# EAGLE board SparkFun_GPS_ZED-F9R_BoB-Panel (EAGLE 9.5.1), part 1 of 2
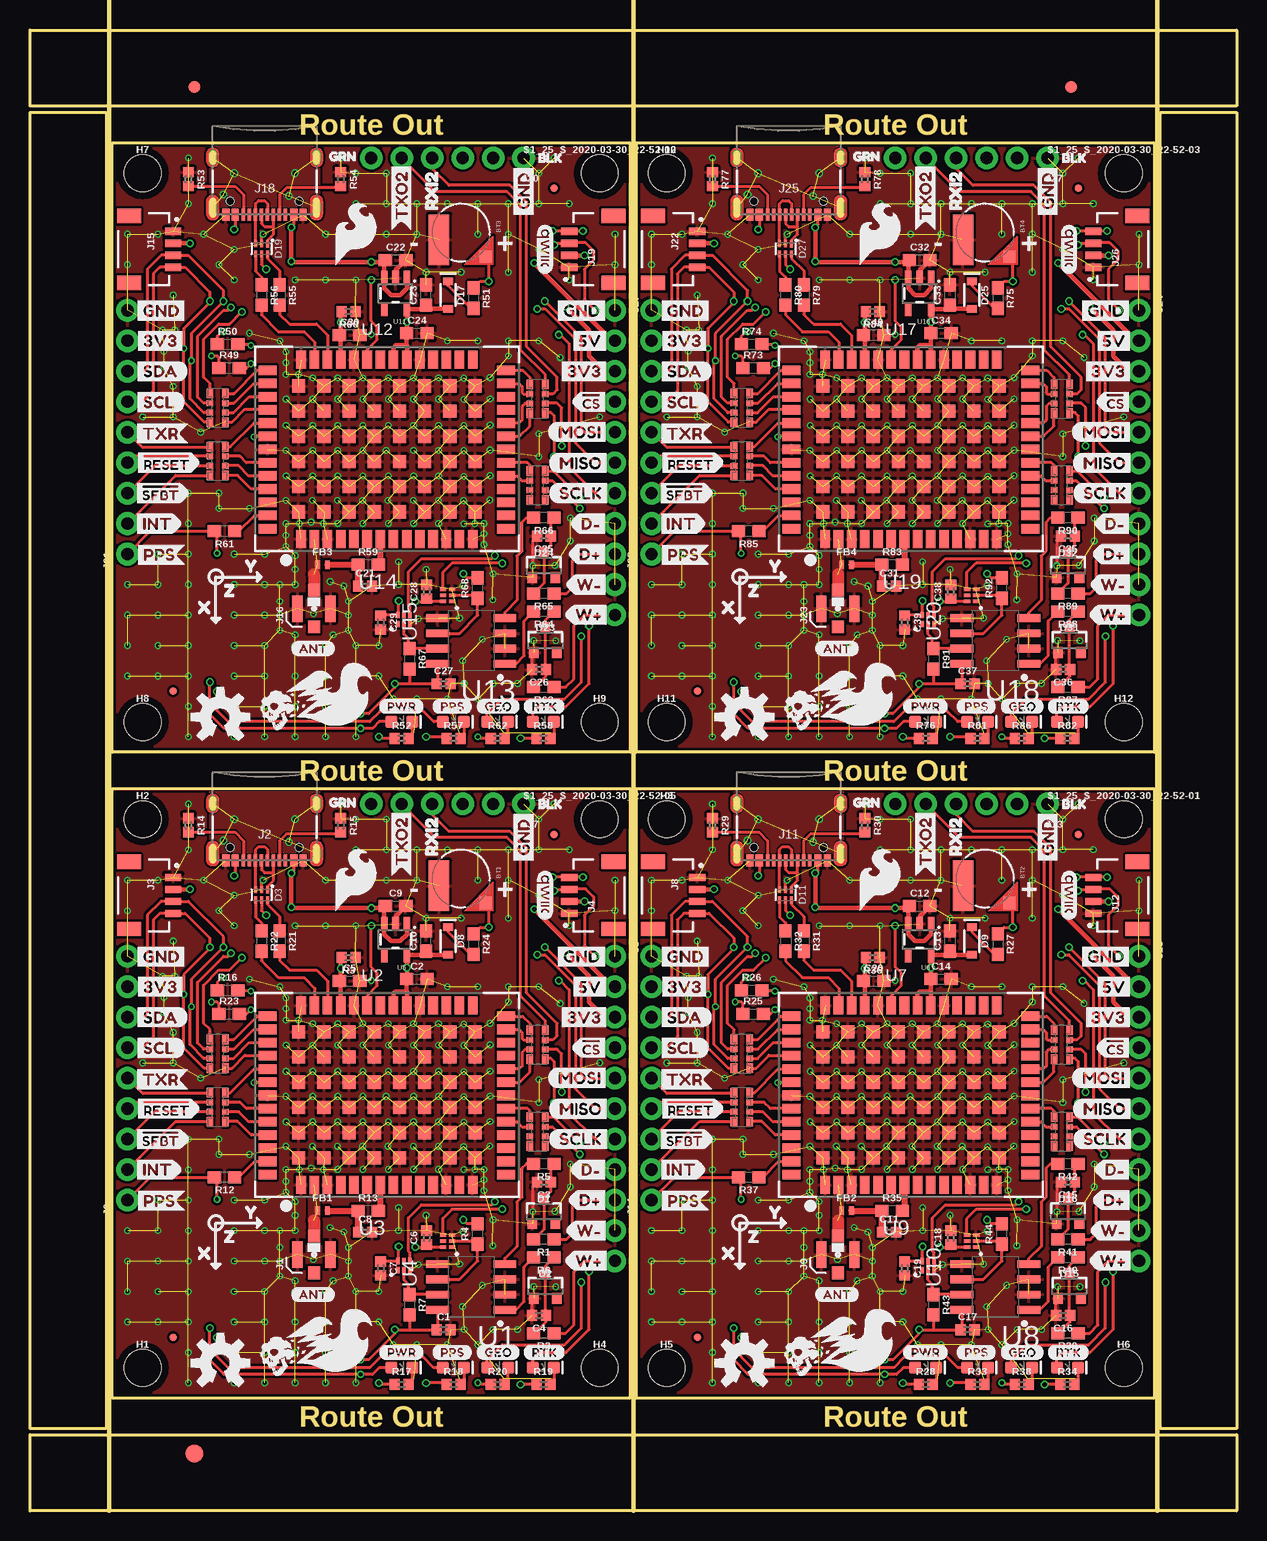
[diagram p0: board, top side]
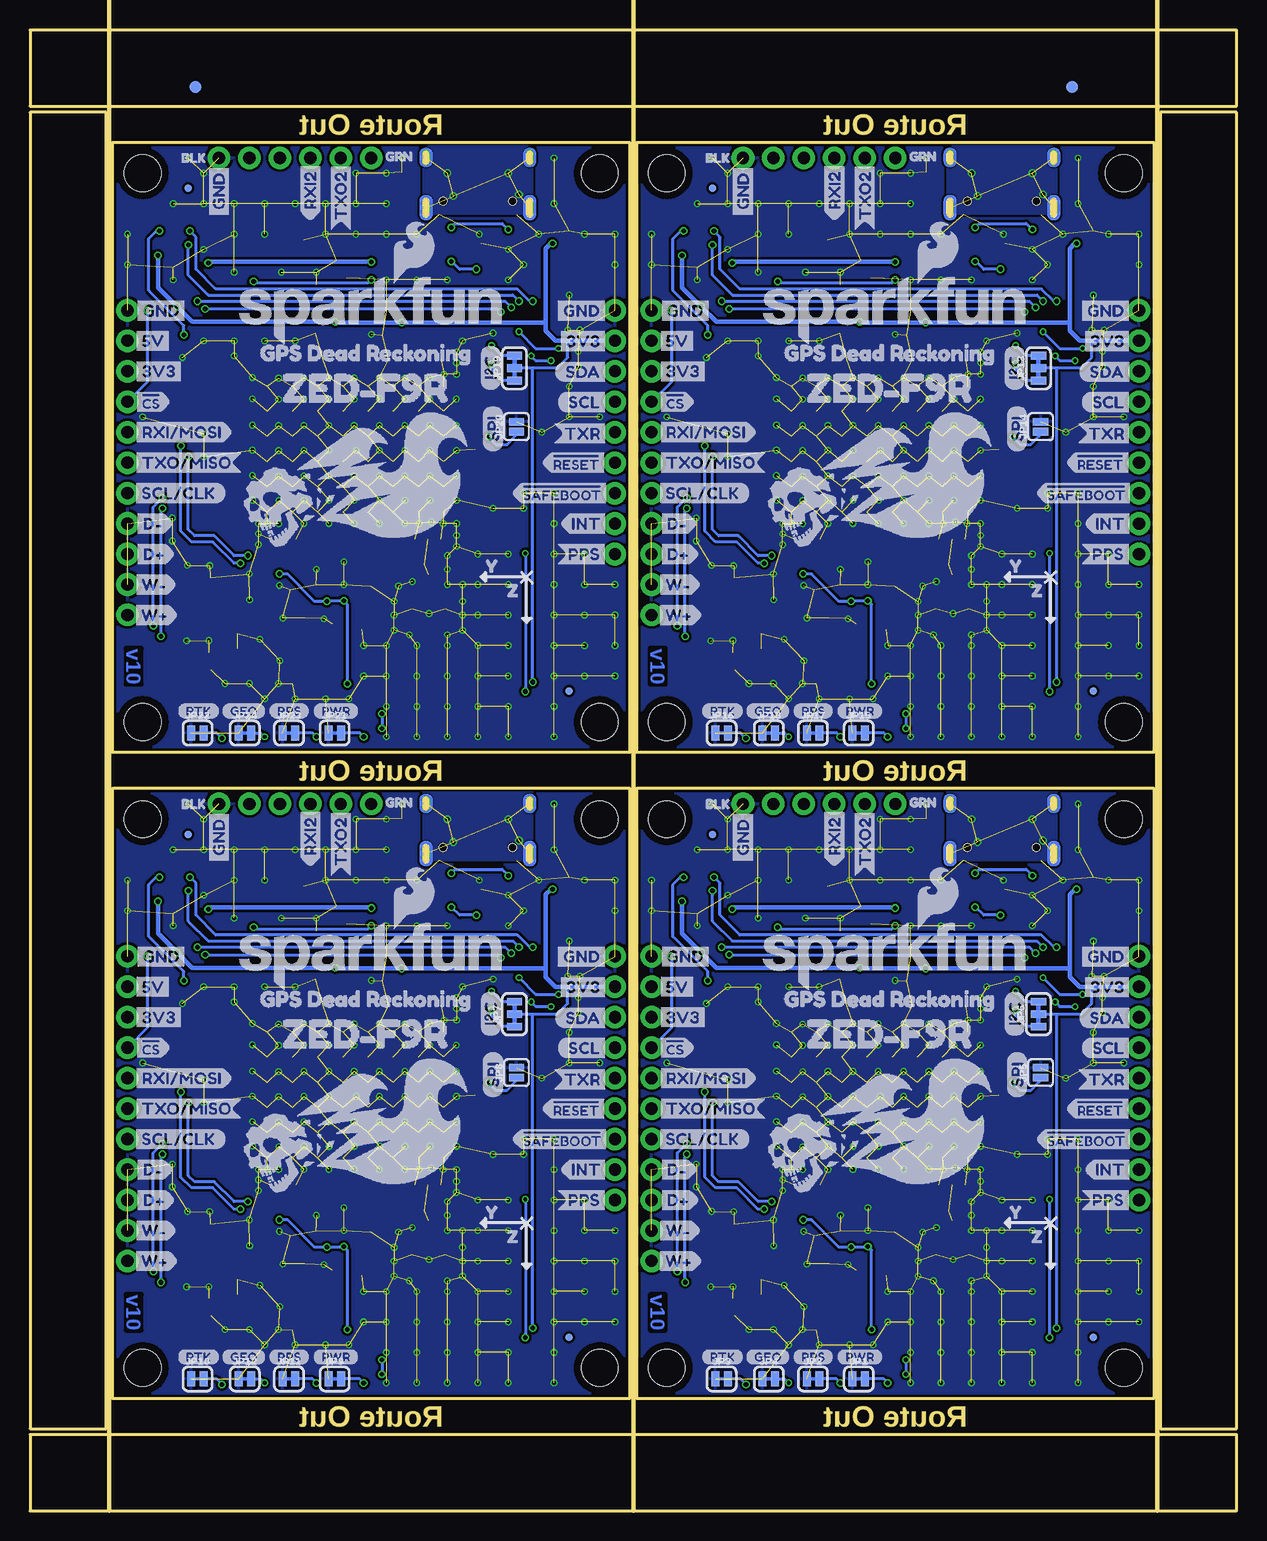
[diagram p1: board, bottom side, seen from below]

Size 100.58 x 123.44 mm. Coordinates in mm from the lower left corner, seen from the top.
Outline: 6.86,9.4 6.86,60.2 50.04,60.2 50.04,9.4 6.86,9.4
Outline: 50.55,9.4 50.55,60.2 93.73,60.2 93.73,9.4 50.55,9.4
Outline: 6.86,63.25 6.86,114.05 50.04,114.05 50.04,63.25 6.86,63.25
Outline: 50.55,63.25 50.55,114.05 93.73,114.05 93.73,63.25 50.55,63.25
Outline: 0,6.35 100.58,6.35 100.58,0 0,0 0,6.35
Outline: 94.23,116.59 100.58,116.59 100.58,6.86 94.23,6.86 94.23,116.59
Outline: 0,123.44 100.58,123.44 100.58,117.09 0,117.09 0,123.44
Outline: 0,116.59 6.35,116.59 6.35,6.86 0,6.86 0,116.59
Copper layers (1*16): Top 0.035mm / dielectric 1.5mm / Bottom 0.035mm
Design rules "Throw": minimum track width 4mil, minimum drill 6mil, track to track 4mil, track to pad 4mil, pad to pad 4mil, via to via 4mil, smd to smd 4mil, copper to edge 4mil, drill to drill 4mil, minimum pad ring 5mil, minimum via ring 5mil, stop-mask expansion 4mil, vias tented up to drill 25mil, thermal gap 10mil
Net classes: 1 Antenna: width 1 mm, clearance 0.3 mm
Milling: 3 lines

## Footprints (pad centres in the part's own frame; a part is rotated, then mirrored left to right if it is on the bottom)
STAND-OFF-TIGHT = hole 3.048: 0,0
ML414H_IV01E = smd 1 x 1: + 2.022,2.032 | smd 4.2 x 1.7: - 0.6,-1.85
0402 = smd 0.85 x 0.9: 1 -0.58,0; 2 0.58,0
0603 = smd 1.1 x 1: 1 -0.85,0; 2 0.85,0
SOT23-3 = smd 0.8 x 0.9: 1 -0.95,-1; 2 0.95,-1; 3 0,1.1
SOT886 = smd 0.61 x 0.25: 1 -0.405,0.5 | smd 0.56 x 0.25: 2 -0.43,0; 3 -0.43,-0.5; 4 0.43,-0.5; 5 0.43,0; 6 0.43,0.5
LED-0603 = smd 1 x 1: A -0.877,0; C 0.877,0
SOD-323 = smd 0.63 x 0.83: A 1.15,0; C -1.15,0
FIDUCIAL-1X2 = smd 1 x 1: 1 0,0
FIDUCIAL-1.5X3 = smd 1.5 x 1.5: 1 0,0
0402_MURATA = smd 0.4 x 0.7: P1 -0.4,0; P2 0.4,0
FIDUCIAL-MICRO = smd 0.635 x 0.635: 1 0,0
U.FL = smd 2.2 x 0.85: 1 0,1.375; 2 0,-1.375 | smd 1.05 x 1: FEED 1.525,0; NC -1.525,0
USB-C-16P-2LAYER-PADS = smd 0.3 x 1: A5 -1.25,-0.34; A6 -0.25,-0.34; A7 0.25,-0.34; A8 1.25,-0.34; B5 1.75,-0.34; B6 0.75,-0.34; B7 -0.75,-0.34; B8 -1.75,-0.34 | smd 0.6 x 1: GND -3.225,-0.34; GND2 3.225,-0.34; VBUS1 -2.45,-0.34; VBUS2 2.45,-0.34 | drill 0.4 pad 0.6 long: SHLD1 -4.318,-0.915; SHLD2 4.318,-0.915; SHLD3 -4.318,-5.095; SHLD4 4.318,-5.095 | hole 0.65: -2.89,-1.445; 2.89,-1.445
JST04_1MM_RA = smd 0.6 x 1.35: 1 -1.5,0; 2 -0.5,0; 3 0.5,0; 4 1.5,0 | smd 1.2 x 2: NC1 2.8,-3.675; NC2 -2.8,-3.675
1X11_NO_SILK = drill 1.016 pad 1.88: 1 0,0; 2 2.54,0; 3 5.08,0; 4 7.62,0; 5 10.16,0; 6 12.7,0; 7 15.24,0; 8 17.78,0; 9 20.32,0; 10 22.86,0; 11 25.4,0
1X09_NO_SILK = drill 1.016 pad 1.88: 1 0,0; 2 2.54,0; 3 5.08,0; 4 7.62,0; 5 10.16,0; 6 12.7,0; 7 15.24,0; 8 17.78,0; 9 20.32,0
1X06_NO_SILK = drill 1.016 pad 1.88: 1 0,0; 2 2.54,0; 3 5.08,0; 4 7.62,0; 5 10.16,0; 6 12.7,0
SMT-JUMPER_2_NC_TRACE_SILK = smd 0.66 x 1.27: 1 -0.521,0; 2 0.521,0
SMT-JUMPER_2_NO_SILK = smd 0.635 x 1.27: 1 -0.406,0; 2 0.406,0
SMT-JUMPER_3_2-NC_TRACE_SILK = smd 0.66 x 1.27: 1 -1.041,0; 2 0,0; 3 1.041,0
1206_RA = smd 0.8 x 0.55: P1 -1.2,-0.62; P4 1.2,-0.62; P5 1.2,0.68; P8 -1.2,0.68 | smd 0.5 x 0.55: P2 -0.4,-0.62; P3 0.4,-0.62; P6 0.4,0.68; P7 -0.4,0.68
SOP_8-PIN = smd 1.9 x 0.64: P1 -2.921,2.032; P2 -2.921,0.762; P3 -2.921,-0.508; P4 -2.921,-1.778; P5 2.679,-1.778; P6 2.679,-0.508; P7 2.679,0.762; P8 2.679,2.032
UBLOX_ZED_F9R = smd 1.1 x 1.1: G1 -7.312,-5.37; G2 -5.212,-5.37; G3 -3.112,-5.37; G4 -1.012,-5.37; G5 1.088,-5.37; G6 3.188,-5.37; G7 5.288,-5.37; G8 7.388,-5.37; G9 7.388,-3.27; G10 5.288,-3.27; G11 3.188,-3.27; G12 1.088,-3.27; G13 -1.012,-3.27; G14 -3.112,-3.27; G15 -5.212,-3.27; G16 -7.312,-3.27; G17 -7.312,-1.17; G18 -5.212,-1.17; G19 -3.112,-1.17; G20 -1.012,-1.17; G21 1.088,-1.17; G22 3.188,-1.17; G23 5.288,-1.17; G24 7.388,-1.17; G25 7.388,0.93; G26 5.288,0.93; G27 3.188,0.93; G28 1.088,0.93; G29 -1.012,0.93; G30 -3.112,0.93; G31 -5.212,0.93; G32 -7.312,0.93; G33 -7.312,3.03; G34 -5.212,3.03; G35 -3.112,3.03; G36 -1.012,3.03; G37 1.088,3.03; G38 3.188,3.03; G39 5.288,3.03; G40 7.388,3.03; G41 7.388,5.13; G42 5.288,5.13; G43 3.188,5.13; G44 1.088,5.13; G45 -1.012,5.13; G46 -3.112,5.13; G47 -5.212,5.13; G48 -7.312,5.13 | smd 0.8 x 1.5: P1 -7.112,-7.62; P2 -6.012,-7.62; P3 -4.912,-7.62; P4 -3.812,-7.62; P5 -2.712,-7.62; P6 -1.612,-7.62; P7 -0.512,-7.62; P8 0.588,-7.62; P9 1.688,-7.62; P10 2.788,-7.62; P11 3.888,-7.62; P12 4.988,-7.62; P13 6.088,-7.62; P14 7.188,-7.62; P28 7.188,7.33; P29 6.088,7.33; P30 4.988,7.33; P31 3.888,7.33; P32 2.788,7.33; P33 1.688,7.33; P34 0.588,7.33; P35 -0.512,7.33; P36 -1.612,7.33; P37 -2.712,7.33; P38 -3.812,7.33; P39 -4.912,7.33; P40 -6.012,7.33; P41 -7.112,7.33 | smd 1.5 x 0.8: P15 9.988,-6.77; P16 9.988,-5.67; P17 9.988,-4.57; P18 9.988,-3.47; P19 9.988,-2.37; P20 9.988,-1.27; P21 9.988,-0.17; P22 9.988,0.93; P23 9.988,2.03; P24 9.988,3.13; P25 9.988,4.23; P26 9.988,5.33; P27 9.988,6.43; P42 -9.912,6.43; P43 -9.912,5.33; P44 -9.912,4.23; P45 -9.912,3.13; P46 -9.912,2.03; P47 -9.912,0.93; P48 -9.912,-0.17; P49 -9.912,-1.27; P50 -9.912,-2.37; P51 -9.912,-3.47; P52 -9.912,-4.57; P53 -9.912,-5.67; P54 -9.912,-6.77
SIP6 = smd 0.3 x 0.52: P1 -0.508,-0.381; P2 -0.008,-0.381; P3 0.492,-0.381; P4 0.492,0.369; P5 -0.008,0.369; P6 -0.508,0.369
SOT23-5 = smd 0.55 x 1.2: 1 -0.95,-1.3; 2 0,-1.3; 3 0.95,-1.3; 4 0.95,1.3; 5 -0.95,1.3

## Placement (x,y rotation side)
$1_25_$_2020-03-30_22-52-01  STAND-OFFTIGHT  [STAND-OFF-TIGHT]  91.19,57.66 0 top
$1_25_$_2020-03-30_22-52-02  STAND-OFFTIGHT  [STAND-OFF-TIGHT]  47.5,111.51 0 top
$1_25_$_2020-03-30_22-52-03  STAND-OFFTIGHT  [STAND-OFF-TIGHT]  91.19,111.51 0 top
$1_25_$_2020-03-30_22-52-05  STAND-OFFTIGHT  [STAND-OFF-TIGHT]  47.5,57.66 0 top
BT1  ML414H_IV01E_BATTERY  [ML414H_IV01E]  35.94,52.7 270 top
BT2  ML414H_IV01E_BATTERY  [ML414H_IV01E]  79.63,52.7 270 top
BT3  ML414H_IV01E_BATTERY  [ML414H_IV01E]  35.94,106.55 270 top
BT4  ML414H_IV01E_BATTERY  [ML414H_IV01E]  79.63,106.55 270 top
C1  0.1uF  [0402]  34.48,15.1 0 top
C2  1.0uF  [0603]  32.26,44.32 0 top
C3  1nF  [0402]  42.84,27.41 180 top
C4  1nF  [0402]  42.43,16.29 180 top
C5  1.0uF  [0603]  26.64,44.17 0 top
C6  0.1uF  [0402]  33.07,22.77 90 top
C7  0.1uF  [0402]  29.24,20.2 270 top
C8  47pF  [0402]  27.94,23.24 0 top
C9  1.0uF  [0603]  30.48,50.42 0 top
C10  1.0uF  [0603]  33.02,47.5 90 top
C11  47pF  [0402]  71.63,23.24 0 top
C12  1.0uF  [0603]  74.17,50.42 0 top
C13  1.0uF  [0603]  76.71,47.5 90 top
C14  1.0uF  [0603]  75.95,44.32 0 top
C15  1nF  [0402]  86.53,27.41 180 top
C16  1nF  [0402]  86.12,16.29 180 top
C17  0.1uF  [0402]  78.17,15.1 0 top
C18  0.1uF  [0402]  76.76,22.77 90 top
C19  0.1uF  [0402]  72.92,20.2 270 top
C20  1.0uF  [0603]  70.33,44.17 0 top
C21  47pF  [0402]  27.94,77.09 0 top
C22  1.0uF  [0603]  30.48,104.27 0 top
C23  1.0uF  [0603]  33.02,101.35 90 top
C24  1.0uF  [0603]  32.26,98.17 0 top
C25  1nF  [0402]  42.84,81.26 180 top
C26  1nF  [0402]  42.43,70.14 180 top
C27  0.1uF  [0402]  34.48,68.95 0 top
C28  0.1uF  [0402]  33.07,76.62 90 top
C29  0.1uF  [0402]  29.24,74.05 270 top
C30  1.0uF  [0603]  26.64,98.02 0 top
C31  47pF  [0402]  71.63,77.09 0 top
C32  1.0uF  [0603]  74.17,104.27 0 top
C33  1.0uF  [0603]  76.71,101.35 90 top
C34  1.0uF  [0603]  75.95,98.17 0 top
C35  1nF  [0402]  86.53,81.26 180 top
C36  1nF  [0402]  86.12,70.14 180 top
C37  0.1uF  [0402]  78.17,68.95 0 top
C38  0.1uF  [0402]  76.76,76.62 90 top
C39  0.1uF  [0402]  72.92,74.05 270 top
C40  1.0uF  [0603]  70.33,98.02 0 top
D1  15V  [SOT23-3]  42.84,24.94 0 top
D2  15V  [SOT23-3]  42.97,18.71 0 top
D3  PRTR5V0U2F  [SOT886]  19.3,51.36 270 top
D4  RED  [LED-0603]  30.99,11.94 0 top
D5  BLUE  [LED-0603]  35.31,11.94 0 top
D6  BLUE  [LED-0603]  42.8,11.94 0 top
D7  BLUE  [LED-0603]  38.99,11.94 0 top
D8  0.5A/40V/420mV  [SOD-323]  34.85,47.5 270 top
D9  0.5A/40V/420mV  [SOD-323]  78.54,47.5 270 top
D10  RED  [LED-0603]  74.68,11.94 0 top
D11  PRTR5V0U2F  [SOT886]  62.99,51.36 270 top
D12  BLUE  [LED-0603]  78.99,11.94 0 top
D13  BLUE  [LED-0603]  86.49,11.94 0 top
D14  BLUE  [LED-0603]  82.68,11.94 0 top
D15  15V  [SOT23-3]  86.65,18.71 0 top
D16  15V  [SOT23-3]  86.53,24.94 0 top
D17  0.5A/40V/420mV  [SOD-323]  34.85,101.35 270 top
D18  RED  [LED-0603]  30.99,65.79 0 top
D19  PRTR5V0U2F  [SOT886]  19.3,105.21 270 top
D20  BLUE  [LED-0603]  35.31,65.79 0 top
D21  BLUE  [LED-0603]  42.8,65.79 0 top
D22  BLUE  [LED-0603]  38.99,65.79 0 top
D23  15V  [SOT23-3]  42.97,72.56 0 top
D24  15V  [SOT23-3]  42.84,78.79 0 top
D25  0.5A/40V/420mV  [SOD-323]  78.54,101.35 270 top
D26  RED  [LED-0603]  74.68,65.79 0 top
D27  PRTR5V0U2F  [SOT886]  62.99,105.21 270 top
D28  BLUE  [LED-0603]  78.99,65.79 0 top
D29  BLUE  [LED-0603]  86.49,65.79 0 top
D30  BLUE  [LED-0603]  82.68,65.79 0 top
D31  15V  [SOT23-3]  86.65,72.56 0 top
D32  15V  [SOT23-3]  86.53,78.79 0 top
E$1  [FIDUCIAL-1X2]  13.72,118.68 0 top
E$2  [FIDUCIAL-1X2]  13.72,118.68 0 bottom
E$3  [FIDUCIAL-1X2]  86.8,118.68 0 top
E$4  [FIDUCIAL-1X2]  86.8,118.68 0 bottom
E$5  [FIDUCIAL-1.5X3]  13.72,4.76 0 top
FB1  120NH  [0402_MURATA]  24.38,25.02 0 top
FB2  120NH  [0402_MURATA]  68.07,25.02 0 top
FB3  120NH  [0402_MURATA]  24.38,78.87 0 top
FB4  120NH  [0402_MURATA]  68.07,78.87 0 top
FD1  FIDUCIALUFIDUCIAL  [FIDUCIAL-MICRO]  11.94,14.48 0 top
FD2  FIDUCIALUFIDUCIAL  [FIDUCIAL-MICRO]  11.94,14.48 0 bottom
FD3  FIDUCIALUFIDUCIAL  [FIDUCIAL-MICRO]  43.69,56.39 0 top
FD4  FIDUCIALUFIDUCIAL  [FIDUCIAL-MICRO]  43.69,56.39 0 bottom
FD5  FIDUCIALUFIDUCIAL  [FIDUCIAL-MICRO]  87.38,56.39 0 top
FD6  FIDUCIALUFIDUCIAL  [FIDUCIAL-MICRO]  55.63,14.48 0 bottom
FD7  FIDUCIALUFIDUCIAL  [FIDUCIAL-MICRO]  87.38,56.39 0 bottom
FD8  FIDUCIALUFIDUCIAL  [FIDUCIAL-MICRO]  55.63,14.48 0 top
FD9  FIDUCIALUFIDUCIAL  [FIDUCIAL-MICRO]  43.69,110.24 0 top
FD10  FIDUCIALUFIDUCIAL  [FIDUCIAL-MICRO]  11.94,68.33 0 bottom
FD11  FIDUCIALUFIDUCIAL  [FIDUCIAL-MICRO]  43.69,110.24 0 bottom
FD12  FIDUCIALUFIDUCIAL  [FIDUCIAL-MICRO]  11.94,68.33 0 top
FD13  FIDUCIALUFIDUCIAL  [FIDUCIAL-MICRO]  87.38,110.24 0 top
FD14  FIDUCIALUFIDUCIAL  [FIDUCIAL-MICRO]  55.63,68.33 0 bottom
FD15  FIDUCIALUFIDUCIAL  [FIDUCIAL-MICRO]  87.38,110.24 0 bottom
FD16  FIDUCIALUFIDUCIAL  [FIDUCIAL-MICRO]  55.63,68.33 0 top
H1  STAND-OFFTIGHT  [STAND-OFF-TIGHT]  9.4,11.91 0 top
H2  STAND-OFFTIGHT  [STAND-OFF-TIGHT]  9.4,57.66 0 top
H3  STAND-OFFTIGHT  [STAND-OFF-TIGHT]  53.09,57.66 0 top
H4  STAND-OFFTIGHT  [STAND-OFF-TIGHT]  47.5,11.91 0 top
H5  STAND-OFFTIGHT  [STAND-OFF-TIGHT]  53.09,11.91 0 top
H6  STAND-OFFTIGHT  [STAND-OFF-TIGHT]  91.19,11.91 0 top
H7  STAND-OFFTIGHT  [STAND-OFF-TIGHT]  9.4,111.51 0 top
H8  STAND-OFFTIGHT  [STAND-OFF-TIGHT]  9.4,65.76 0 top
H9  STAND-OFFTIGHT  [STAND-OFF-TIGHT]  47.5,65.76 0 top
H10  STAND-OFFTIGHT  [STAND-OFF-TIGHT]  53.09,111.51 0 top
H11  STAND-OFFTIGHT  [STAND-OFF-TIGHT]  53.09,65.76 0 top
H12  STAND-OFFTIGHT  [STAND-OFF-TIGHT]  91.19,65.76 0 top
J1  U.FL  [U.FL]  23.67,21.36 90 top
J2  [USB-C-16P-2LAYER-PADS]  19.56,53.87 180 top
J3  QWIIC_RIGHT_ANGLE  [JST04_1MM_RA]  11.94,51.31 270 top
J4  QWIIC_RIGHT_ANGLE  [JST04_1MM_RA]  44.96,51.31 90 top
J5  [1X11_NO_SILK]  48.77,46.23 270 top
J6  [1X09_NO_SILK]  8.13,25.91 90 top
J7  [1X06_NO_SILK]  41.15,58.93 180 top
J8  QWIIC_RIGHT_ANGLE  [JST04_1MM_RA]  55.63,51.31 270 top
J9  U.FL  [U.FL]  67.36,21.36 90 top
J10  [1X11_NO_SILK]  92.46,46.23 270 top
J11  [USB-C-16P-2LAYER-PADS]  63.25,53.87 180 top
J12  QWIIC_RIGHT_ANGLE  [JST04_1MM_RA]  88.65,51.31 90 top
J13  [1X06_NO_SILK]  84.84,58.93 180 top
J14  [1X09_NO_SILK]  51.82,25.91 90 top
J15  QWIIC_RIGHT_ANGLE  [JST04_1MM_RA]  11.94,105.16 270 top
J16  U.FL  [U.FL]  23.67,75.21 90 top
J17  [1X11_NO_SILK]  48.77,100.08 270 top
J18  [USB-C-16P-2LAYER-PADS]  19.56,107.72 180 top
J19  QWIIC_RIGHT_ANGLE  [JST04_1MM_RA]  44.96,105.16 90 top
J20  [1X06_NO_SILK]  41.15,112.78 180 top
J21  [1X09_NO_SILK]  8.13,79.76 90 top
J22  QWIIC_RIGHT_ANGLE  [JST04_1MM_RA]  55.63,105.16 270 top
J23  U.FL  [U.FL]  67.36,75.21 90 top
J24  [1X11_NO_SILK]  92.46,100.08 270 top
J25  [USB-C-16P-2LAYER-PADS]  63.25,107.72 180 top
J26  QWIIC_RIGHT_ANGLE  [JST04_1MM_RA]  88.65,105.16 90 top
J27  [1X06_NO_SILK]  84.84,112.78 180 top
J28  [1X09_NO_SILK]  51.82,79.76 90 top
JP1  JUMPER-SMT_2_NC_TRACE_SILK  [SMT-JUMPER_2_NC_TRACE_SILK]  31.5,11 0 bottom
JP2  JUMPER-SMT_2_NC_TRACE_SILK  [SMT-JUMPER_2_NC_TRACE_SILK]  35.31,11 0 bottom
JP3  JUMPER-SMT_2_NC_TRACE_SILK  [SMT-JUMPER_2_NC_TRACE_SILK]  42.93,11 0 bottom
JP4  JUMPER-SMT_2_NC_TRACE_SILK  [SMT-JUMPER_2_NC_TRACE_SILK]  38.99,11 0 bottom
JP5  JUMPER-SMT_2_NO_SILK  [SMT-JUMPER_2_NO_SILK]  16.33,36.53 90 bottom
JP6  JUMPER-SMT_3_2-NC_TRACE_SILK  [SMT-JUMPER_3_2-NC_TRACE_SILK]  16.51,41.4 90 bottom
JP7  JUMPER-SMT_3_2-NC_TRACE_SILK  [SMT-JUMPER_3_2-NC_TRACE_SILK]  60.2,41.4 90 bottom
JP8  JUMPER-SMT_2_NO_SILK  [SMT-JUMPER_2_NO_SILK]  60.02,36.53 90 bottom
JP9  JUMPER-SMT_2_NC_TRACE_SILK  [SMT-JUMPER_2_NC_TRACE_SILK]  75.18,11 0 bottom
JP10  JUMPER-SMT_2_NC_TRACE_SILK  [SMT-JUMPER_2_NC_TRACE_SILK]  86.61,11 0 bottom
JP11  JUMPER-SMT_2_NC_TRACE_SILK  [SMT-JUMPER_2_NC_TRACE_SILK]  78.99,11 0 bottom
JP12  JUMPER-SMT_2_NC_TRACE_SILK  [SMT-JUMPER_2_NC_TRACE_SILK]  82.68,11 0 bottom
JP13  JUMPER-SMT_3_2-NC_TRACE_SILK  [SMT-JUMPER_3_2-NC_TRACE_SILK]  16.51,95.25 90 bottom
JP14  JUMPER-SMT_2_NO_SILK  [SMT-JUMPER_2_NO_SILK]  16.33,90.37 90 bottom
JP15  JUMPER-SMT_2_NC_TRACE_SILK  [SMT-JUMPER_2_NC_TRACE_SILK]  31.5,64.85 0 bottom
JP16  JUMPER-SMT_2_NC_TRACE_SILK  [SMT-JUMPER_2_NC_TRACE_SILK]  42.93,64.85 0 bottom
JP17  JUMPER-SMT_2_NC_TRACE_SILK  [SMT-JUMPER_2_NC_TRACE_SILK]  35.31,64.85 0 bottom
JP18  JUMPER-SMT_2_NC_TRACE_SILK  [SMT-JUMPER_2_NC_TRACE_SILK]  38.99,64.85 0 bottom
JP19  JUMPER-SMT_3_2-NC_TRACE_SILK  [SMT-JUMPER_3_2-NC_TRACE_SILK]  60.2,95.25 90 bottom
JP20  JUMPER-SMT_2_NO_SILK  [SMT-JUMPER_2_NO_SILK]  60.02,90.37 90 bottom
JP21  JUMPER-SMT_2_NC_TRACE_SILK  [SMT-JUMPER_2_NC_TRACE_SILK]  75.18,64.85 0 bottom
JP22  JUMPER-SMT_2_NC_TRACE_SILK  [SMT-JUMPER_2_NC_TRACE_SILK]  86.61,64.85 0 bottom
JP23  JUMPER-SMT_2_NC_TRACE_SILK  [SMT-JUMPER_2_NC_TRACE_SILK]  78.99,64.85 0 bottom
JP24  JUMPER-SMT_2_NC_TRACE_SILK  [SMT-JUMPER_2_NC_TRACE_SILK]  82.68,64.85 0 bottom
LOGO1  OSHW-LOGOM  [OSHW-LOGO-M]  15.88,12.32 0 top
LOGO2  QWIIC_LOGO_4MM  [QWIIC_4MM]  42.93,51.31 270 top
LOGO3  SFE_LOGO_NAME_FLAME.2_INCH  [SFE_LOGO_NAME_FLAME_.2]  28.45,46.23 0 bottom
LOGO4  SFE_LOGO_NAME_FLAME.2_INCH  [SFE_LOGO_NAME_FLAME_.2]  72.14,46.23 0 bottom
LOGO5  QWIIC_LOGO_4MM  [QWIIC_4MM]  86.61,51.31 270 top
LOGO6  OSHW-LOGOM  [OSHW-LOGO-M]  59.56,12.32 0 top
LOGO7  SFE_LOGO_NAME_FLAME.2_INCH  [SFE_LOGO_NAME_FLAME_.2]  28.45,100.08 0 bottom
LOGO8  QWIIC_LOGO_4MM  [QWIIC_4MM]  42.93,105.16 270 top
LOGO9  OSHW-LOGOM  [OSHW-LOGO-M]  15.88,66.17 0 top
LOGO10  SFE_LOGO_NAME_FLAME.2_INCH  [SFE_LOGO_NAME_FLAME_.2]  72.14,100.08 0 bottom
LOGO11  QWIIC_LOGO_4MM  [QWIIC_4MM]  86.61,105.16 270 top
LOGO12  OSHW-LOGOM  [OSHW-LOGO-M]  59.56,66.17 0 top
R1  3.3k  [0603]  42.84,22.63 180 top
R2  3.3k  [0603]  42.84,14.82 180 top
R3  100K  [0402]  26.57,46.13 180 top
R4  910  [0603]  37.33,23.08 90 top
R5  470  [0603]  42.84,28.93 180 top
R6  470  [0603]  42.84,21.13 180 top
R7  910  [0603]  31.64,17.18 270 top
R8  33  [1206_RA]  15.62,33.66 270 top
R9  33  [1206_RA]  15.62,38.1 270 top
R10  33  [1206_RA]  42.29,38.86 270 top
R11  33  [1206_RA]  42.29,31.62 270 top
R12  33  [0603]  16.22,27.81 180 top
R13  33  [0603]  28.19,25.02 0 top
R14  5.1k  [0402]  13.21,57.15 270 top
R15  5.1k  [0402]  25.91,57.15 270 top
R16  2.2k  [0603]  16.48,43.4 0 top
R17  1KOHM-0402-1/16W-1%  [0402]  30.99,10.54 0 top
R18  1KOHM-0402-1/16W-1%  [0402]  35.31,10.54 0 top
R19  1KOHM-0402-1/16W-1%  [0402]  42.8,10.54 0 top
R20  1KOHM-0402-1/16W-1%  [0402]  38.99,10.54 0 top
R21  27  [0603]  20.83,47.5 270 top
R22  27  [0603]  19.3,47.5 270 top
R23  2.2k  [0603]  16.61,41.43 0 top
R24  3.3k  [0603]  36.98,47.24 270 top
R25  2.2k  [0603]  60.29,41.43 0 top
R26  2.2k  [0603]  60.17,43.4 0 top
R27  3.3k  [0603]  80.67,47.24 270 top
R28  1KOHM-0402-1/16W-1%  [0402]  74.68,10.54 0 top
R29  5.1k  [0402]  56.9,57.15 270 top
R30  5.1k  [0402]  69.6,57.15 270 top
R31  27  [0603]  64.52,47.5 270 top
R32  27  [0603]  62.99,47.5 270 top
R33  1KOHM-0402-1/16W-1%  [0402]  78.99,10.54 0 top
R34  1KOHM-0402-1/16W-1%  [0402]  86.49,10.54 0 top
R35  33  [0603]  71.88,25.02 0 top
R36  100K  [0402]  70.26,46.13 180 top
R37  33  [0603]  59.91,27.81 180 top
R38  1KOHM-0402-1/16W-1%  [0402]  82.68,10.54 0 top
R39  3.3k  [0603]  86.53,14.82 180 top
R40  470  [0603]  86.53,21.13 180 top
R41  3.3k  [0603]  86.53,22.63 180 top
R42  470  [0603]  86.53,28.93 180 top
R43  910  [0603]  75.33,17.18 270 top
R44  910  [0603]  81.02,23.08 90 top
R45  33  [1206_RA]  59.31,38.1 270 top
R46  33  [1206_RA]  59.31,33.66 270 top
R47  33  [1206_RA]  85.98,38.86 270 top
R48  33  [1206_RA]  85.98,31.62 270 top
R49  2.2k  [0603]  16.61,95.28 0 top
R50  2.2k  [0603]  16.48,97.25 0 top
R51  3.3k  [0603]  36.98,101.09 270 top
R52  1KOHM-0402-1/16W-1%  [0402]  30.99,64.39 0 top
R53  5.1k  [0402]  13.21,111 270 top
R54  5.1k  [0402]  25.91,111 270 top
R55  27  [0603]  20.83,101.35 270 top
R56  27  [0603]  19.3,101.35 270 top
R57  1KOHM-0402-1/16W-1%  [0402]  35.31,64.39 0 top
R58  1KOHM-0402-1/16W-1%  [0402]  42.8,64.39 0 top
R59  33  [0603]  28.19,78.87 0 top
R60  100K  [0402]  26.57,99.97 180 top
R61  33  [0603]  16.22,81.66 180 top
R62  1KOHM-0402-1/16W-1%  [0402]  38.99,64.39 0 top
R63  3.3k  [0603]  42.84,68.67 180 top
R64  470  [0603]  42.84,74.97 180 top
R65  3.3k  [0603]  42.84,76.48 180 top
R66  470  [0603]  42.84,82.78 180 top
R67  910  [0603]  31.64,71.03 270 top
R68  910  [0603]  37.33,76.93 90 top
R69  33  [1206_RA]  15.62,91.95 270 top
R70  33  [1206_RA]  15.62,87.5 270 top
R71  33  [1206_RA]  42.29,92.71 270 top
R72  33  [1206_RA]  42.29,85.47 270 top
R73  2.2k  [0603]  60.29,95.28 0 top
R74  2.2k  [0603]  60.17,97.25 0 top
R75  3.3k  [0603]  80.67,101.09 270 top
R76  1KOHM-0402-1/16W-1%  [0402]  74.68,64.39 0 top
R77  5.1k  [0402]  56.9,111 270 top
R78  5.1k  [0402]  69.6,111 270 top
R79  27  [0603]  64.52,101.35 270 top
R80  27  [0603]  62.99,101.35 270 top
R81  1KOHM-0402-1/16W-1%  [0402]  78.99,64.39 0 top
R82  1KOHM-0402-1/16W-1%  [0402]  86.49,64.39 0 top
R83  33  [0603]  71.88,78.87 0 top
R84  100K  [0402]  70.26,99.97 180 top
R85  33  [0603]  59.91,81.66 180 top
R86  1KOHM-0402-1/16W-1%  [0402]  82.68,64.39 0 top
R87  3.3k  [0603]  86.53,68.67 180 top
R88  470  [0603]  86.53,74.97 180 top
R89  3.3k  [0603]  86.53,76.48 180 top
R90  470  [0603]  86.53,82.78 180 top
R91  910  [0603]  75.33,71.03 270 top
R92  910  [0603]  81.02,76.93 90 top
R93  33  [1206_RA]  59.31,91.95 270 top
R94  33  [1206_RA]  59.31,87.5 270 top
R95  33  [1206_RA]  85.98,92.71 270 top
R96  33  [1206_RA]  85.98,85.47 270 top
U1  DUAL-OPTO_HCPL-073L  [SOP_8-PIN]  36.67,18.79 180 top
U2  U-BLOX_ZED_F9R  [UBLOX_ZED_F9R]  29.72,34.8 0 top
U3  UHS_INVERTER_SCHMITT_TRIGGERSIP6  [SIP6]  31.19,20.45 0 top
U4  UHS_INVERTER_SCHMITT_TRIGGERSIP6  [SIP6]  34.8,22.48 90 top
U5  3.3V  [SOT23-5]  30.48,47.62 180 top
U6  3.3V  [SOT23-5]  74.17,47.62 180 top
U7  U-BLOX_ZED_F9R  [UBLOX_ZED_F9R]  73.41,34.8 0 top
U8  DUAL-OPTO_HCPL-073L  [SOP_8-PIN]  80.36,18.79 180 top
U9  UHS_INVERTER_SCHMITT_TRIGGERSIP6  [SIP6]  74.88,20.45 0 top
U10  UHS_INVERTER_SCHMITT_TRIGGERSIP6  [SIP6]  78.49,22.48 90 top
U11  3.3V  [SOT23-5]  30.48,101.47 180 top
U12  U-BLOX_ZED_F9R  [UBLOX_ZED_F9R]  29.72,88.65 0 top
U13  DUAL-OPTO_HCPL-073L  [SOP_8-PIN]  36.67,72.64 180 top
U14  UHS_INVERTER_SCHMITT_TRIGGERSIP6  [SIP6]  31.19,74.3 0 top
U15  UHS_INVERTER_SCHMITT_TRIGGERSIP6  [SIP6]  34.8,76.33 90 top
U16  3.3V  [SOT23-5]  74.17,101.47 180 top
U17  U-BLOX_ZED_F9R  [UBLOX_ZED_F9R]  73.41,88.65 0 top
U18  DUAL-OPTO_HCPL-073L  [SOP_8-PIN]  80.36,72.64 180 top
U19  UHS_INVERTER_SCHMITT_TRIGGERSIP6  [SIP6]  74.88,74.3 0 top
U20  UHS_INVERTER_SCHMITT_TRIGGERSIP6  [SIP6]  78.49,76.33 90 top
U$1  [3V3-04]  43.84,41.15 0 top
U$2  [GND-04]  43.56,46.2 0 top
U$3  [D#0]  44.86,25.91 0 top
U$4  [PPS8]  33.53,13.21 0 top
U$5  [PWR10]  29.08,13.21 0 top
U$6  [D#1]  45.01,28.45 0 top
U$7  [#RESET2]  14.35,33.53 0 bottom
U$8  [RTK9]  41.15,13.21 0 top
U$9  [W#2]  44.58,20.85 0 top
U$10  [W#3]  44.63,23.37 0 top
U$11  [5V]  44.81,43.69 0 top
U$12  [INT1]  8.43,28.45 0 top
U$13  [PPS4]  8.53,25.86 0 top
U$14  [RXI22]  33.48,53.67 90 top
U$15  [GND-04]  41.15,53.72 90 top
U$16  [TXO21]  30.96,52.83 90 top
U$17  [SCLK1]  43.21,30.99 0 top
U$18  [TXR0]  8.43,35.97 0 top
U$19  [DEAD#RECKONING#GPS#BOARD#SILK#FINAL#JPG]  29.72,32.26 0 bottom
U$20  [DEAD#RECKONING#GPS#BOARD#SILK#FINAL#JPG]  23.88,14.1 0 top
U$21  [BLK2]  41.66,58.93 0 top
U$22  [RTK9]  44.58,12.83 0 bottom
U$23  [GRN1]  24.26,59.05 0 top
U$24  [INT2]  12.7,28.45 0 bottom
U$25  [GPS_DEAD_RECKONING0]  38.86,42.67 0 bottom
U$26  [CS#-<]-04]  44.96,38.61 0 top
U$27  [PPS1]  12.95,25.91 0 bottom
U$28  [#SAFEBOOT3]  16.89,30.99 0 bottom
U$29  [3V3-04]  48.51,41.15 0 bottom
U$30  [RXI#MOSI0]  48.51,36.07 0 bottom
U$31  [GND-04]  48.39,46.2 0 bottom
U$32  [X1]  13.08,21.46 0 top
U$33  [5V]  48.51,43.69 0 bottom
U$34  [GND-04]  41.15,53.72 90 bottom
U$35  [RXI28]  33.53,53.72 90 bottom
U$36  [TXO21]  30.99,52.83 90 bottom
U$37  [TXO#MISO1]  48.51,33.53 0 bottom
U$38  [SCL#CLK2]  48.51,30.99 0 bottom
U$39  [SCL5]  12.93,38.58 0 bottom
U$40  [3V3-04]  13.13,43.66 0 bottom
U$41  [GND-04]  13.34,46.2 0 bottom
U$42  [SDA4]  13.16,41.1 0 bottom
U$43  [TXR3]  13.28,35.97 0 bottom
U$44  [#RESET1]  8.38,33.53 0 top
U$45  [SPI4]  18.29,34.42 90 bottom
U$46  [I_SUPER2_C-()-04]  18.49,39.53 90 bottom
U$47  [PPS8]  36.96,12.83 0 bottom
U$48  [PWR10]  33.27,12.83 0 bottom
U$49  [ANT0]  21.72,18.03 0 top
U$50  [Y2]  17.02,24.89 0 top
U$51  [ZED#F9R0]  37.85,39.75 0 bottom
U$52  [Y2]  19.81,24.89 0 bottom
U$53  [GRN1]  27.94,59.05 0 bottom
U$54  [BLK2]  44.96,58.93 0 bottom
U$55  [#SFBT0]  8.25,30.99 0 top
U$56  [GEO1]  37.21,13.21 0 top
U$57  [Z0]  18.03,22.86 0 bottom
U$58  [GEO1]  40.89,12.83 0 bottom
U$59  [CS#-[>-04]  48.64,38.61 0 bottom
U$60  [D#0]  48.39,25.91 0 bottom
U$61  [W#2]  48.54,20.83 0 bottom
U$62  [SFE_LOGO_FLAME_.2]  27.18,52.58 0 top
U$63  [Z0]  15.24,22.86 0 top
U$64  [D#1]  48.39,28.45 0 bottom
U$65  [W#3]  48.54,23.37 0 bottom
U$66  [MISO-(]-04]  43.18,33.5 0 top
U$67  [SCL-[)]  8.51,38.58 0 top
U$68  [SDA-[)]  8.51,41.15 0 top
U$69  [MOSI-(]-04]  43.1,36.09 0 top
U$70  [3V3-04]  8.51,43.69 0 top
U$71  [GND-04]  8.51,46.2 0 top
U$72  [CS#-<]-04]  88.65,38.61 0 top
U$73  [PPS8]  77.22,13.21 0 top
U$74  [PWR10]  72.77,13.21 0 top
U$75  [RTK9]  84.84,13.21 0 top
U$76  [BLK2]  85.34,58.93 0 top
U$77  [GRN1]  67.95,59.05 0 top
U$78  [3V3-04]  56.82,43.66 0 bottom
U$79  [GND-04]  57.02,46.2 0 bottom
U$80  [3V3-04]  92.2,41.15 0 bottom
U$81  [GND-04]  92.08,46.2 0 bottom
U$82  [5V]  92.2,43.69 0 bottom
U$83  [GND-04]  84.84,53.72 90 bottom
U$84  [RXI28]  77.22,53.72 90 bottom
U$85  [TXO21]  74.68,52.83 90 bottom
U$86  [SPI4]  61.98,34.42 90 bottom
U$87  [I_SUPER2_C-()-04]  62.18,39.53 90 bottom
U$88  [RTK9]  88.27,12.83 0 bottom
U$89  [PPS8]  80.65,12.83 0 bottom
U$90  [PWR10]  76.96,12.83 0 bottom
U$91  [ANT0]  65.41,18.03 0 top
U$92  [ZED#F9R0]  81.53,39.75 0 bottom
U$93  [GRN1]  71.63,59.05 0 bottom
U$94  [BLK2]  88.65,58.93 0 bottom
U$95  [INT2]  56.39,28.45 0 bottom
U$96  [PPS1]  56.64,25.91 0 bottom
U$97  [CS#-[>-04]  92.33,38.61 0 bottom
U$98  [RXI#MOSI0]  92.2,36.07 0 bottom
U$99  [TXO#MISO1]  92.2,33.53 0 bottom
U$100  [SCL#CLK2]  92.2,30.99 0 bottom
U$101  [SCL5]  56.62,38.58 0 bottom
U$102  [SDA4]  56.85,41.1 0 bottom
U$103  [TXR3]  56.97,35.97 0 bottom
U$104  [#RESET1]  52.07,33.53 0 top
U$105  [#RESET2]  58.04,33.53 0 bottom
U$106  [#SAFEBOOT3]  60.58,30.99 0 bottom
U$107  [#SFBT0]  51.94,30.99 0 top
U$108  [GEO1]  80.9,13.21 0 top
U$109  [GEO1]  84.58,12.83 0 bottom
U$110  [SFE_LOGO_FLAME_.2]  70.87,52.58 0 top
U$111  [SCL-[)]  52.2,38.58 0 top
U$112  [SDA-[)]  52.2,41.15 0 top
U$113  [3V3-04]  52.2,43.69 0 top
U$114  [GND-04]  52.2,46.2 0 top
U$115  [3V3-04]  87.53,41.15 0 top
U$116  [GND-04]  87.25,46.2 0 top
U$117  [MISO-(]-04]  86.87,33.5 0 top
U$118  [MOSI-(]-04]  86.79,36.09 0 top
U$119  [D#0]  88.55,25.91 0 top
U$120  [D#1]  88.7,28.45 0 top
U$121  [W#2]  88.27,20.85 0 top
U$122  [W#3]  88.32,23.37 0 top
U$123  [5V]  88.49,43.69 0 top
U$124  [INT1]  52.12,28.45 0 top
U$125  [PPS4]  52.22,25.86 0 top
U$126  [GND-04]  84.84,53.72 90 top
U$127  [TXO21]  74.65,52.83 90 top
U$128  [RXI22]  77.17,53.67 90 top
U$129  [SCLK1]  86.89,30.99 0 top
U$130  [TXR0]  52.12,35.97 0 top
U$131  [GPS_DEAD_RECKONING0]  82.55,42.67 0 bottom
U$132  [DEAD#RECKONING#GPS#BOARD#SILK#FINAL#JPG]  73.41,32.26 0 bottom
U$133  [DEAD#RECKONING#GPS#BOARD#SILK#FINAL#JPG]  67.56,14.1 0 top
U$134  [X1]  56.77,21.46 0 top
U$135  [Y2]  60.71,24.89 0 top
U$136  [Y2]  63.5,24.89 0 bottom
U$137  [Z0]  61.72,22.86 0 bottom
U$138  [Z0]  58.93,22.86 0 top
U$139  [D#0]  92.08,25.91 0 bottom
U$140  [W#2]  92.23,20.83 0 bottom
U$141  [D#1]  92.08,28.45 0 bottom
U$142  [W#3]  92.23,23.37 0 bottom
U$143  [CS#-<]-04]  44.96,92.46 0 top
U$144  [PPS8]  33.53,67.06 0 top
U$145  [PWR10]  29.08,67.06 0 top
U$146  [RTK9]  41.15,67.06 0 top
U$147  [BLK2]  41.66,112.78 0 top
U$148  [GRN1]  24.26,112.9 0 top
U$149  [3V3-04]  13.13,97.51 0 bottom
U$150  [GND-04]  13.34,100.05 0 bottom
U$151  [3V3-04]  48.51,95 0 bottom
U$152  [GND-04]  48.39,100.05 0 bottom
U$153  [5V]  48.51,97.54 0 bottom
U$154  [GND-04]  41.15,107.57 90 bottom
U$155  [RXI28]  33.53,107.57 90 bottom
U$156  [TXO21]  30.99,106.68 90 bottom
U$157  [SPI4]  18.29,88.27 90 bottom
U$158  [I_SUPER2_C-()-04]  18.49,93.38 90 bottom
U$159  [RTK9]  44.58,66.67 0 bottom
U$160  [PPS8]  36.96,66.67 0 bottom
U$161  [PWR10]  33.27,66.67 0 bottom
U$162  [ANT0]  21.72,71.88 0 top
U$163  [ZED#F9R0]  37.85,93.6 0 bottom
U$164  [GRN1]  27.94,112.9 0 bottom
U$165  [BLK2]  44.96,112.78 0 bottom
U$166  [INT2]  12.7,82.3 0 bottom
U$167  [PPS1]  12.95,79.76 0 bottom
U$168  [CS#-[>-04]  48.64,92.46 0 bottom
U$169  [RXI#MOSI0]  48.51,89.92 0 bottom
U$170  [TXO#MISO1]  48.51,87.38 0 bottom
U$171  [SCL#CLK2]  48.51,84.84 0 bottom
U$172  [SCL5]  12.93,92.43 0 bottom
U$173  [SDA4]  13.16,94.95 0 bottom
U$174  [TXR3]  13.28,89.81 0 bottom
U$175  [#RESET1]  8.38,87.38 0 top
U$176  [#RESET2]  14.35,87.38 0 bottom
U$177  [#SAFEBOOT3]  16.89,84.84 0 bottom
U$178  [#SFBT0]  8.25,84.84 0 top
U$179  [GEO1]  37.21,67.06 0 top
U$180  [GEO1]  40.89,66.67 0 bottom
U$181  [SFE_LOGO_FLAME_.2]  27.18,106.43 0 top
U$182  [SCL-[)]  8.51,92.43 0 top
U$183  [SDA-[)]  8.51,95 0 top
U$184  [3V3-04]  8.51,97.54 0 top
U$185  [GND-04]  8.51,100.05 0 top
U$186  [3V3-04]  43.84,95 0 top
U$187  [GND-04]  43.56,100.05 0 top
U$188  [MISO-(]-04]  43.18,87.35 0 top
U$189  [MOSI-(]-04]  43.1,89.94 0 top
U$190  [D#0]  44.86,79.75 0 top
U$191  [D#1]  45.01,82.3 0 top
U$192  [W#2]  44.58,74.7 0 top
U$193  [W#3]  44.63,77.22 0 top
U$194  [5V]  44.81,97.54 0 top
U$195  [INT1]  8.43,82.3 0 top
U$196  [PPS4]  8.53,79.71 0 top
U$197  [GND-04]  41.15,107.57 90 top
U$198  [TXO21]  30.96,106.68 90 top
U$199  [RXI22]  33.48,107.52 90 top
U$200  [SCLK1]  43.21,84.84 0 top
U$201  [TXR0]  8.43,89.81 0 top
U$202  [GPS_DEAD_RECKONING0]  38.86,96.52 0 bottom
U$203  [DEAD#RECKONING#GPS#BOARD#SILK#FINAL#JPG]  29.72,86.11 0 bottom
U$204  [DEAD#RECKONING#GPS#BOARD#SILK#FINAL#JPG]  23.88,67.94 0 top
U$205  [X1]  13.08,75.31 0 top
U$206  [Y2]  17.02,78.74 0 top
U$207  [Y2]  19.81,78.74 0 bottom
U$208  [Z0]  18.03,76.71 0 bottom
U$209  [Z0]  15.24,76.71 0 top
U$210  [D#0]  48.39,79.76 0 bottom
U$211  [W#2]  48.54,74.68 0 bottom
U$212  [D#1]  48.39,82.3 0 bottom
U$213  [W#3]  48.54,77.22 0 bottom
U$214  [CS#-<]-04]  88.65,92.46 0 top
U$215  [PPS8]  77.22,67.06 0 top
U$216  [PWR10]  72.77,67.06 0 top
U$217  [RTK9]  84.84,67.06 0 top
U$218  [BLK2]  85.34,112.78 0 top
U$219  [GRN1]  67.95,112.9 0 top
U$220  [3V3-04]  56.82,97.51 0 bottom
U$221  [GND-04]  57.02,100.05 0 bottom
U$222  [3V3-04]  92.2,95 0 bottom
U$223  [GND-04]  92.08,100.05 0 bottom
U$224  [5V]  92.2,97.54 0 bottom
U$225  [GND-04]  84.84,107.57 90 bottom
U$226  [RXI28]  77.22,107.57 90 bottom
U$227  [TXO21]  74.68,106.68 90 bottom
U$228  [SPI4]  61.98,88.27 90 bottom
U$229  [I_SUPER2_C-()-04]  62.18,93.38 90 bottom
U$230  [RTK9]  88.27,66.67 0 bottom
U$231  [PPS8]  80.65,66.67 0 bottom
U$232  [PWR10]  76.96,66.67 0 bottom
U$233  [ANT0]  65.41,71.88 0 top
U$234  [ZED#F9R0]  81.53,93.6 0 bottom
U$235  [GRN1]  71.63,112.9 0 bottom
U$236  [BLK2]  88.65,112.78 0 bottom
U$237  [INT2]  56.39,82.3 0 bottom
U$238  [PPS1]  56.64,79.76 0 bottom
U$239  [CS#-[>-04]  92.33,92.46 0 bottom
U$240  [RXI#MOSI0]  92.2,89.92 0 bottom
U$241  [TXO#MISO1]  92.2,87.38 0 bottom
U$242  [SCL#CLK2]  92.2,84.84 0 bottom
U$243  [SCL5]  56.62,92.43 0 bottom
U$244  [SDA4]  56.85,94.95 0 bottom
U$245  [TXR3]  56.97,89.81 0 bottom
U$246  [#RESET1]  52.07,87.38 0 top
U$247  [#RESET2]  58.04,87.38 0 bottom
U$248  [#SAFEBOOT3]  60.58,84.84 0 bottom
U$249  [#SFBT0]  51.94,84.84 0 top
U$250  [GEO1]  80.9,67.06 0 top
U$251  [GEO1]  84.58,66.67 0 bottom
U$252  [SFE_LOGO_FLAME_.2]  70.87,106.43 0 top
U$253  [SCL-[)]  52.2,92.43 0 top
U$254  [SDA-[)]  52.2,95 0 top
U$255  [3V3-04]  52.2,97.54 0 top
U$256  [GND-04]  52.2,100.05 0 top
U$257  [3V3-04]  87.53,95 0 top
U$258  [GND-04]  87.25,100.05 0 top
U$259  [MISO-(]-04]  86.87,87.35 0 top
U$260  [MOSI-(]-04]  86.79,89.94 0 top
U$261  [D#0]  88.55,79.75 0 top
U$262  [D#1]  88.7,82.3 0 top
U$263  [W#2]  88.27,74.7 0 top
U$264  [W#3]  88.32,77.22 0 top
U$265  [5V]  88.49,97.54 0 top
U$266  [INT1]  52.12,82.3 0 top
U$267  [PPS4]  52.22,79.71 0 top
U$268  [GND-04]  84.84,107.57 90 top
U$269  [TXO21]  74.65,106.68 90 top
U$270  [RXI22]  77.17,107.52 90 top
U$271  [SCLK1]  86.89,84.84 0 top
U$272  [TXR0]  52.12,89.81 0 top
U$273  [GPS_DEAD_RECKONING0]  82.55,96.52 0 bottom
U$274  [DEAD#RECKONING#GPS#BOARD#SILK#FINAL#JPG]  73.41,86.11 0 bottom
U$275  [DEAD#RECKONING#GPS#BOARD#SILK#FINAL#JPG]  67.56,67.94 0 top
U$276  [X1]  56.77,75.31 0 top
U$277  [Y2]  60.71,78.74 0 top
U$278  [Y2]  63.5,78.74 0 bottom
U$279  [Z0]  61.72,76.71 0 bottom
U$280  [Z0]  58.93,76.71 0 top
U$281  [D#0]  92.08,79.76 0 bottom
U$282  [W#2]  92.23,74.68 0 bottom
U$283  [D#1]  92.08,82.3 0 bottom
U$284  [W#3]  92.23,77.22 0 bottom

## Library data of the parts
$1_25_$_2020-03-30_22-52-01-$1_25_$_2020-03-30_22-52-03 $1_25_$_2020-03-30_22-52-05 H1-H12 = SparkFun-Hardware
BT1-BT4 = SparkFun-Batteries; PROD_ID: BATT-14267
C1 C6 C7 C17-C19 C27-C29 C37-C39 = SparkFun-Capacitors; PROD_ID: CAP-15083
C2 C5 C9 C10 C12-C14 C20 C22-C24 C30 C32-C34 C40 = SparkFun-Capacitors; PROD_ID: CAP-13930
C3 C4 C15 C16 C25 C26 C35 C36 = SparkFun-Capacitors; PROD_ID: CAP-15061
C8 C11 C21 C31 = SparkFun-Capacitors; PROD_ID: CAP-15063
D1 D2 D15 D16 D23 D24 D31 D32 = SparkFun-DiscreteSemi; PROD_ID: DIO-15071
D3 D11 D19 D27 = SparkFun-IC-Power; PROD_ID: DIO-14084
D4 D10 D18 D26 = SparkFun-LED; PROD_ID: DIO-00819
D5-D7 D12-D14 D20-D22 D28-D30 = SparkFun-LED; PROD_ID: DIO-08575
D8 D9 D17 D25 = SparkFun-DiscreteSemi; PROD_ID: DIO-10955
E$1-E$4 FD1-FD16 LOGO1-LOGO12 U$62 U$110 U$181 U$252 = SparkFun-Aesthetics
E$5 = SparkFun-Retired
FB1-FB4 = SparkFun-Coils; PROD_ID: NDUC-15072
J1 J9 J16 J23 = SparkFun-Connectors; PROD_ID: CONN-09193; SF_ID: WRL-09144
J2 J11 J18 J25 = SparkFun-Connectors; PROD_ID: CONN-14122
J3 J4 J8 J12 J15 J19 J22 J26 = SparkFun-Connectors; PROD_ID: CONN-13694
J5-J7 J10 J13 J14 J17 J20 J21 J24 J27 J28 = SparkFun-Connectors
JP1-JP24 = SparkFun-Jumpers
R1 R2 R24 R27 R39 R41 R51 R63 R65 R75 R87 R89 = SparkFun-Resistors; PROD_ID: RES-07851
R3 R36 R60 R84 = SparkFun-Resistors; PROD_ID: RES-13495
R4 R7 R43 R44 R67 R68 R91 R92 = SparkFun-Resistors; PROD_ID: RES-13860
R5 R6 R40 R42 R64 R66 R88 R90 = SparkFun-Resistors; PROD_ID: RES-07869
R8-R11 R45-R48 R69-R72 R93-R96 = SparkFun-Resistors; PROD_ID: RES-15081
R12 R13 R35 R37 R59 R61 R83 R85 = SparkFun-Resistors; PROD_ID: RES-08270
R14 R15 R29 R30 R53 R54 R77 R78 = SparkFun-Resistors; PROD_ID: RES-14340
R16 R23 R25 R26 R49 R50 R73 R74 = SparkFun-Resistors; PROD_ID: RES-08272
R17-R20 R28 R33 R34 R38 R52 R57 R58 R62 R76 R81 R82 R86 = SparkFun-Resistors; PROD_ID: RES-14342
R21 R22 R31 R32 R55 R56 R79 R80 = SparkFun-Resistors; PROD_ID: RES-09334
U1 U8 U13 U18 = SparkFun-DiscreteSemi; PROD_ID: IC-15070
U2 U7 U12 U17 = SparkFun-GPS; PROD_ID: IC-14716
U3 U4 U9 U10 U14 U15 U19 U20 = SparkFun-IC-Amplifiers; PROD_ID: IC-15068
U5 U6 U11 U16 = SparkFun-IC-Power; PROD_ID: VREG-12457
U$1 U$2 U$11 U$15 U$26 U$29 U$31 U$33 U$34 U$40 U$41 U$46 U$59 U$66-U$72 U$78-U$83 U$87 U$97 U$111-U$118 U$123 U$126 U$143 U$149-U$154 U$158 U$168 U$182-U$189 U$194 U$197 U$214 U$220-U$225 U$229 U$239 U$253-U$260 U$265 U$268 = Labels
U$3 U$6 U$9 U$10 U$119-U$122 U$190-U$193 U$261-U$264 = wt_dir
U$4 U$5 U$8 U$22 U$47 U$48 U$73-U$75 U$88-U$90 U$144-U$146 U$159-U$161 U$215-U$217 U$230-U$232 = ALL labels
U$7 U$28 U$44 U$104-U$106 U$175-U$177 U$246-U$248 = corrected_safe_reset
U$12 U$13 U$35 U$84 U$124 U$125 U$155 U$195 U$196 U$226 U$266 U$267 = ALL_LABELS
U$14 U$17 U$18 U$128-U$130 U$199-U$201 U$270-U$272 = txr_rxi
U$16 U$36 U$85 U$127 U$156 U$198 U$227 U$269 = moar
U$19 U$132 U$203 U$274 = Dead#Reckoning#GPS#board#silk#FINAL#png
U$20 U$133 U$204 U$275 = Dead#Reckoning#GPS#board#silk#FINALSMALL
U$21 U$23 U$53 U$54 U$76 U$77 U$93 U$94 U$147 U$148 U$164 U$165 U$218 U$219 U$235 U$236 = TXR
U$24 U$27 U$95 U$96 U$166 U$167 U$237 U$238 = bottom labels
U$25 U$131 U$202 U$273 = dead reckoning
U$30 U$37-U$39 U$42 U$43 U$98-U$103 U$169-U$174 U$240-U$245 = corrected_bottom
U$32 U$50 U$52 U$57 U$63 U$134-U$138 U$205-U$209 U$276-U$280 = Orientation
U$45 U$86 U$157 U$228 = more_all_labels
U$49 U$91 U$162 U$233 = ant
U$51 U$92 U$163 U$234 = zed
U$55 U$56 U$58 U$107-U$109 U$178-U$180 U$249-U$251 = wat-for-reals
U$60 U$61 U$64 U$65 U$139-U$142 U$210-U$213 U$281-U$284 = D+,D-

## Nets
3.3V: C1.1 C2.1 C5.1 C6.1 C7.1 C10.1 D4.A D8.A J3.2 J4.2 J5.3 J6.8 JP6.2 R3.2 R4.2 R7.2 U1.P8 U2.P33 U2.P34 U2.P38 U3.P6 U4.P6 U5.5
3.3V1: C13.1 C14.1 C17.1 C18.1 C19.1 C20.1 D9.A D10.A J8.2 J10.3 J12.2 J14.8 JP7.2 R36.2 R43.2 R44.2 U6.5 U7.P33 U7.P34 U7.P38 U8.P8 U9.P6 U10.P6
3.3V2: C23.1 C24.1 C27.1 C28.1 C29.1 C30.1 D17.A D18.A J15.2 J17.3 J19.2 J21.8 JP13.2 R60.2 R67.2 R68.2 U11.5 U12.P33 U12.P34 U12.P38 U13.P8 U14.P6 U15.P6
3.3V3: C33.1 C34.1 C37.1 C38.1 C39.1 C40.1 D25.A D26.A J22.2 J24.3 J26.2 J28.8 JP19.2 R84.2 R91.2 R92.2 U16.5 U17.P33 U17.P34 U17.P38 U18.P8 U19.P6 U20.P6
!RESET: J6.4 R8.P2
!RESET1: J14.4 R46.P2
!RESET2: J21.4 R70.P2
!RESET3: J28.4 R94.P2
!SAFEBOOT: J6.3 R8.P3
!SAFEBOOT1: J14.3 R46.P3
!SAFEBOOT2: J21.3 R70.P3
!SAFEBOOT3: J28.3 R94.P3
D_SEL: JP5.1 U2.P47
D_SEL1: JP8.1 U7.P47
D_SEL2: JP14.1 U12.P47
D_SEL3: JP20.1 U17.P47
DIR+: J5.9 R1.1
DIR+1: J10.9 R41.1
DIR+2: J17.9 R65.1
DIR+3: J24.9 R89.1
DIR_IN: R5.2 U1.P4
DIR_IN1: R42.2 U8.P4
DIR_IN2: R66.2 U13.P4
DIR_IN3: R90.2 U18.P4
DIR_OUT: R10.P6 U4.P4
DIR_OUT1: R47.P6 U10.P4
DIR_OUT2: R71.P6 U15.P4
DIR_OUT3: R95.P6 U20.P4
DIR_SCHMITT: R4.1 U1.P6 U4.P2
DIR_SCHMITT1: R44.1 U8.P6 U10.P2
DIR_SCHMITT2: R68.1 U13.P6 U15.P2
DIR_SCHMITT3: R92.1 U18.P6 U20.P2
DMINUS: R21.2 U2.P39
DMINUS1: R31.2 U7.P39
DMINUS2: R55.2 U12.P39
DMINUS3: R79.2 U17.P39
DPLUS: R22.2 U2.P40
DPLUS1: R32.2 U7.P40
DPLUS2: R56.2 U12.P40
DPLUS3: R80.2 U17.P40
GEOF_STAT: D7.A R11.P7
GEOF_STAT1: D14.A R48.P7
GEOF_STAT2: D22.A R72.P7
GEOF_STAT3: D30.A R96.P7
GND: BT1.- C1.2 C2.2 C3.2 C4.2 C5.2 C6.2 C7.2 C8.2 C9.2 C10.2 D1.1 D2.1 D3.2 J1.1 J1.2 J2.GND J2.GND2 J3.1 J4.1 J5.1 J5.8 J5.10 J6.9 J7.1 JP1.1 JP2.1 JP3.1 JP4.1 JP5.2 R3.1 R14.1 R15.1 U1.P2 U1.P3 U1.P5 U2.G1 U2.G2 U2.G3 U2.G4 U2.G5 U2.G6 U2.G7 U2.G8 U2.G9 U2.G10 U2.G11 U2.G12 U2.G13 U2.G14 U2.G15 U2.G16 U2.G17 U2.G18 U2.G19 U2.G20 U2.G21 U2.G22 U2.G23 U2.G24 U2.G25 U2.G26 U2.G27 U2.G28 U2.G29 U2.G30 U2.G31 U2.G32 U2.G33 U2.G34 U2.G35 U2.G36 U2.G37 U2.G38 U2.G39 U2.G40 U2.G41 U2.G42 U2.G43 U2.G44 U2.G45 U2.G46 U2.G47 U2.G48 U2.P1 U2.P3 U2.P12 U2.P14 U2.P32 U2.P37 U2.P41 U2.P48 U3.P3 U4.P3 U5.2
GND1: BT2.- C11.2 C12.2 C13.2 C14.2 C15.2 C16.2 C17.2 C18.2 C19.2 C20.2 D11.2 D15.1 D16.1 J8.1 J9.1 J9.2 J10.1 J10.8 J10.10 J11.GND J11.GND2 J12.1 J13.1 J14.9 JP8.2 JP9.1 JP10.1 JP11.1 JP12.1 R29.1 R30.1 R36.1 U6.2 U7.G1 U7.G2 U7.G3 U7.G4 U7.G5 U7.G6 U7.G7 U7.G8 U7.G9 U7.G10 U7.G11 U7.G12 U7.G13 U7.G14 U7.G15 U7.G16 U7.G17 U7.G18 U7.G19 U7.G20 U7.G21 U7.G22 U7.G23 U7.G24 U7.G25 U7.G26 U7.G27 U7.G28 U7.G29 U7.G30 U7.G31 U7.G32 U7.G33 U7.G34 U7.G35 U7.G36 U7.G37 U7.G38 U7.G39 U7.G40 U7.G41 U7.G42 U7.G43 U7.G44 U7.G45 U7.G46 U7.G47 U7.G48 U7.P1 U7.P3 U7.P12 U7.P14 U7.P32 U7.P37 U7.P41 U7.P48 U8.P2 U8.P3 U8.P5 U9.P3 U10.P3
GND2: BT3.- C21.2 C22.2 C23.2 C24.2 C25.2 C26.2 C27.2 C28.2 C29.2 C30.2 D19.2 D23.1 D24.1 J15.1 J16.1 J16.2 J17.1 J17.8 J17.10 J18.GND J18.GND2 J19.1 J20.1 J21.9 JP14.2 JP15.1 JP16.1 JP17.1 JP18.1 R53.1 R54.1 R60.1 U11.2 U12.G1 U12.G2 U12.G3 U12.G4 U12.G5 U12.G6 U12.G7 U12.G8 U12.G9 U12.G10 U12.G11 U12.G12 U12.G13 U12.G14 U12.G15 U12.G16 U12.G17 U12.G18 U12.G19 U12.G20 U12.G21 U12.G22 U12.G23 U12.G24 U12.G25 U12.G26 U12.G27 U12.G28 U12.G29 U12.G30 U12.G31 U12.G32 U12.G33 U12.G34 U12.G35 U12.G36 U12.G37 U12.G38 U12.G39 U12.G40 U12.G41 U12.G42 U12.G43 U12.G44 U12.G45 U12.G46 U12.G47 U12.G48 U12.P1 U12.P3 U12.P12 U12.P14 U12.P32 U12.P37 U12.P41 U12.P48 U13.P2 U13.P3 U13.P5 U14.P3 U15.P3
GND3: BT4.- C31.2 C32.2 C33.2 C34.2 C35.2 C36.2 C37.2 C38.2 C39.2 C40.2 D27.2 D31.1 D32.1 J22.1 J23.1 J23.2 J24.1 J24.8 J24.10 J25.GND J25.GND2 J26.1 J27.1 J28.9 JP20.2 JP21.1 JP22.1 JP23.1 JP24.1 R77.1 R78.1 R84.1 U16.2 U17.G1 U17.G2 U17.G3 U17.G4 U17.G5 U17.G6 U17.G7 U17.G8 U17.G9 U17.G10 U17.G11 U17.G12 U17.G13 U17.G14 U17.G15 U17.G16 U17.G17 U17.G18 U17.G19 U17.G20 U17.G21 U17.G22 U17.G23 U17.G24 U17.G25 U17.G26 U17.G27 U17.G28 U17.G29 U17.G30 U17.G31 U17.G32 U17.G33 U17.G34 U17.G35 U17.G36 U17.G37 U17.G38 U17.G39 U17.G40 U17.G41 U17.G42 U17.G43 U17.G44 U17.G45 U17.G46 U17.G47 U17.G48 U17.P1 U17.P3 U17.P12 U17.P14 U17.P32 U17.P37 U17.P41 U17.P48 U18.P2 U18.P3 U18.P5 U19.P3 U20.P3
INT: J6.2 R8.P4
INT1: J14.2 R46.P4
INT2: J21.2 R70.P4
INT3: J28.2 R94.P4
N$1: JP6.1 R23.2
N$2: D8.C R24.2
N$3: JP6.3 R16.2
N$4: D4.C R17.2
N$5: C8.1 FB1.P2 R13.1
N$6: D3.3 J2.A6 J2.B6
N$7: D3.1 J2.A7 J2.B7
N$8: JP1.2 R17.1
N$9: D3.6 R21.1
N$10: D3.4 R22.1
N$11: R8.P7 U2.P49
N$12: R8.P5 U2.P51
N$13: D9.C R27.2
N$14: J2.B5 R14.2
N$15: J2.A5 R15.2
N$16: R9.P6 U2.P44
N$17: R9.P5 U2.P45
N$18: R8.P8 U2.P46
N$19: R9.P8 U2.P42
N$20: R9.P7 U2.P43
N$21: R10.P1 U2.P27
N$22: JP3.2 R19.1
N$23: JP2.2 R18.1
N$24: D5.C R18.2
N$25: D6.C R19.2
N$26: R10.P2 U2.P26
N$27: R11.P2 U2.P19
N$28: R11.P1 U2.P20
N$29: R12.1 U2.P53
N$30: R8.P6 U2.P50
N$31: R10.P4 U2.P22
N$32: R10.P3 U2.P23
N$33: JP4.2 R20.1
N$34: D7.C R20.2
N$35: C4.1 D2.3 R2.2 R6.1
N$36: JP7.1 R25.2
N$37: C3.1 D1.3 R1.2 R5.1
N$38: JP7.3 R26.2
N$39: J11.B5 R29.2
N$40: J11.A5 R30.2
N$41: JP10.2 R34.1
N$42: JP11.2 R33.1
N$43: D12.C R33.2
N$44: D13.C R34.2
N$45: D10.C R28.2
N$46: JP9.2 R28.1
N$47: C11.1 FB2.P2 R35.1
N$48: D11.3 J11.A6 J11.B6
N$49: D11.1 J11.A7 J11.B7
N$50: D11.6 R31.1
N$51: D11.4 R32.1
N$52: R46.P7 U7.P49
N$53: R46.P5 U7.P51
N$54: R45.P6 U7.P44
N$55: R45.P5 U7.P45
N$56: R46.P8 U7.P46
N$57: R45.P8 U7.P42
N$58: R45.P7 U7.P43
N$59: R47.P1 U7.P27
N$60: R47.P2 U7.P26
N$61: R48.P2 U7.P19
N$62: R48.P1 U7.P20
N$63: R37.1 U7.P53
N$64: R46.P6 U7.P50
N$65: R47.P4 U7.P22
N$66: R47.P3 U7.P23
N$67: JP12.2 R38.1
N$68: D14.C R38.2
N$69: C16.1 D15.3 R39.2 R40.1
N$70: C15.1 D16.3 R41.2 R42.1
N$71: D17.C R51.2
N$72: JP13.1 R49.2
N$73: JP13.3 R50.2
N$74: J18.B5 R53.2
N$75: J18.A5 R54.2
N$76: JP16.2 R58.1
N$77: JP17.2 R57.1
N$78: D20.C R57.2
N$79: D21.C R58.2
N$80: D18.C R52.2
N$81: JP15.2 R52.1
N$82: C21.1 FB3.P2 R59.1
N$83: D19.3 J18.A6 J18.B6
N$84: D19.1 J18.A7 J18.B7
N$85: D19.6 R55.1
N$86: D19.4 R56.1
N$87: R70.P7 U12.P49
N$88: R70.P5 U12.P51
N$89: R69.P6 U12.P44
N$90: R69.P5 U12.P45
N$91: R70.P8 U12.P46
N$92: R69.P8 U12.P42
N$93: R69.P7 U12.P43
N$94: R71.P1 U12.P27
N$95: R71.P2 U12.P26
N$96: R72.P2 U12.P19
N$97: R72.P1 U12.P20
N$98: R61.1 U12.P53
N$99: R70.P6 U12.P50
N$100: R71.P4 U12.P22
N$101: R71.P3 U12.P23
N$102: JP18.2 R62.1
N$103: D22.C R62.2
N$104: C26.1 D23.3 R63.2 R64.1
N$105: C25.1 D24.3 R65.2 R66.1
N$106: D25.C R75.2
N$107: JP19.1 R73.2
N$108: JP19.3 R74.2
N$109: J25.B5 R77.2
N$110: J25.A5 R78.2
N$111: JP22.2 R82.1
N$112: JP23.2 R81.1
N$113: D28.C R81.2
N$114: D29.C R82.2
N$115: D26.C R76.2
N$116: JP21.2 R76.1
N$117: C31.1 FB4.P2 R83.1
N$118: D27.3 J25.A6 J25.B6
N$119: D27.1 J25.A7 J25.B7
N$120: D27.6 R79.1
N$121: D27.4 R80.1
N$122: R94.P7 U17.P49
N$123: R94.P5 U17.P51
N$124: R93.P6 U17.P44
N$125: R93.P5 U17.P45
N$126: R94.P8 U17.P46
N$127: R93.P8 U17.P42
N$128: R93.P7 U17.P43
N$129: R95.P1 U17.P27
N$130: R95.P2 U17.P26
N$131: R96.P2 U17.P19
N$132: R96.P1 U17.P20
N$133: R85.1 U17.P53
N$134: R94.P6 U17.P50
N$135: R95.P4 U17.P22
N$136: R95.P3 U17.P23
N$137: JP24.2 R86.1
N$138: D30.C R86.2
N$139: C36.1 D31.3 R87.2 R88.1
N$140: C35.1 D32.3 R89.2 R90.1
PPS: D5.A J6.1 R12.2
PPS1: D12.A J14.1 R37.2
PPS2: D20.A J21.1 R61.2
PPS3: D28.A J28.1 R85.2
RF_IN [Antenna]: FB1.P1 J1.FEED U2.P2
RF_IN1 [Antenna]: FB2.P1 J9.FEED U7.P2
RF_IN2 [Antenna]: FB3.P1 J16.FEED U12.P2
RF_IN3 [Antenna]: FB4.P1 J23.FEED U17.P2
RTK_STAT: D6.A R11.P8
RTK_STAT1: D13.A R48.P8
RTK_STAT2: D21.A R72.P8
RTK_STAT3: D29.A R96.P8
RXI1: J13.4 R47.P7
RXI2: J7.4 R10.P7
RXI3: J20.4 R71.P7
RXI4: J27.4 R95.P7
RXI/MOSI: J5.5 R9.P2
RXI/MOSI1: J10.5 R45.P2
RXI/MOSI2: J17.5 R69.P2
RXI/MOSI3: J24.5 R93.P2
SCL/CLK: J3.4 J4.4 J5.7 J6.6 R9.P4 R16.1
SCL/CLK1: J8.4 J10.7 J12.4 J14.6 R26.1 R45.P4
SCL/CLK2: J15.4 J17.7 J19.4 J21.6 R50.1 R69.P4
SCL/CLK3: J22.4 J24.7 J26.4 J28.6 R74.1 R93.P4
SDA/!CS: J3.3 J4.3 J5.4 J6.7 R9.P3 R23.1
SDA/!CS1: J8.3 J10.4 J12.3 J14.7 R25.1 R45.P3
SDA/!CS2: J15.3 J17.4 J19.3 J21.7 R49.1 R69.P3
SDA/!CS3: J22.3 J24.4 J26.3 J28.7 R73.1 R93.P3
SHIELD: J2.SHLD1 J2.SHLD2 J2.SHLD3 J2.SHLD4
SHIELD1: J11.SHLD1 J11.SHLD2 J11.SHLD3 J11.SHLD4
SHIELD2: J18.SHLD1 J18.SHLD2 J18.SHLD3 J18.SHLD4
SHIELD3: J25.SHLD1 J25.SHLD2 J25.SHLD3 J25.SHLD4
TX_READY: J6.5 R8.P1
TX_READY1: J14.5 R46.P1
TX_READY2: J21.5 R70.P1
TX_READY3: J28.5 R94.P1
TXO1: J13.5 R47.P8
TXO2: J7.5 R10.P8
TXO3: J20.5 R71.P8
TXO4: J27.5 R95.P8
TXO/MISO: J5.6 R9.P1
TXO/MISO1: J10.6 R45.P1
TXO/MISO2: J17.6 R69.P1
TXO/MISO3: J24.6 R93.P1
V_BATT: BT1.+ R24.1 U2.P36
V_BATT1: BT2.+ R27.1 U7.P36
V_BATT2: BT3.+ R51.1 U12.P36
V_BATT3: BT4.+ R75.1 U17.P36
V_RF: R13.2 U2.P7
V_RF1: R35.2 U7.P7
V_RF2: R59.2 U12.P7
V_RF3: R83.2 U17.P7
VIN: C9.1 D3.5 J2.VBUS1 J2.VBUS2 J5.2 U5.1 U5.3
VIN1: C12.1 D11.5 J10.2 J11.VBUS1 J11.VBUS2 U6.1 U6.3
VIN2: C22.1 D19.5 J17.2 J18.VBUS1 J18.VBUS2 U11.1 U11.3
VIN3: C32.1 D27.5 J24.2 J25.VBUS1 J25.VBUS2 U16.1 U16.3
WT+: J5.11 R2.1
WT+1: J10.11 R39.1
WT+2: J17.11 R63.1
WT+3: J24.11 R87.1
WT_IN: R6.2 U1.P1
WT_IN1: R40.2 U8.P1
WT_IN2: R64.2 U13.P1
WT_IN3: R88.2 U18.P1
WT_OUT: R10.P5 U3.P4
WT_OUT1: R47.P5 U9.P4
WT_OUT2: R71.P5 U14.P4
WT_OUT3: R95.P5 U19.P4
WT_SCHMITT: R7.1 U1.P7 U3.P2
WT_SCHMITT1: R43.1 U8.P7 U9.P2
WT_SCHMITT2: R67.1 U13.P7 U14.P2
WT_SCHMITT3: R91.1 U18.P7 U19.P2